# Altium PCB stm32f030.PcbDoc
Units mm, origin at the board's own origin, x right, y up, seen from the top; angles counter-clockwise.
Board outline 50 x 50 mm, 2 copper layers (Top Layer, Bottom Layer); 64 components, 41 nets, 240 pads, 200 vias.
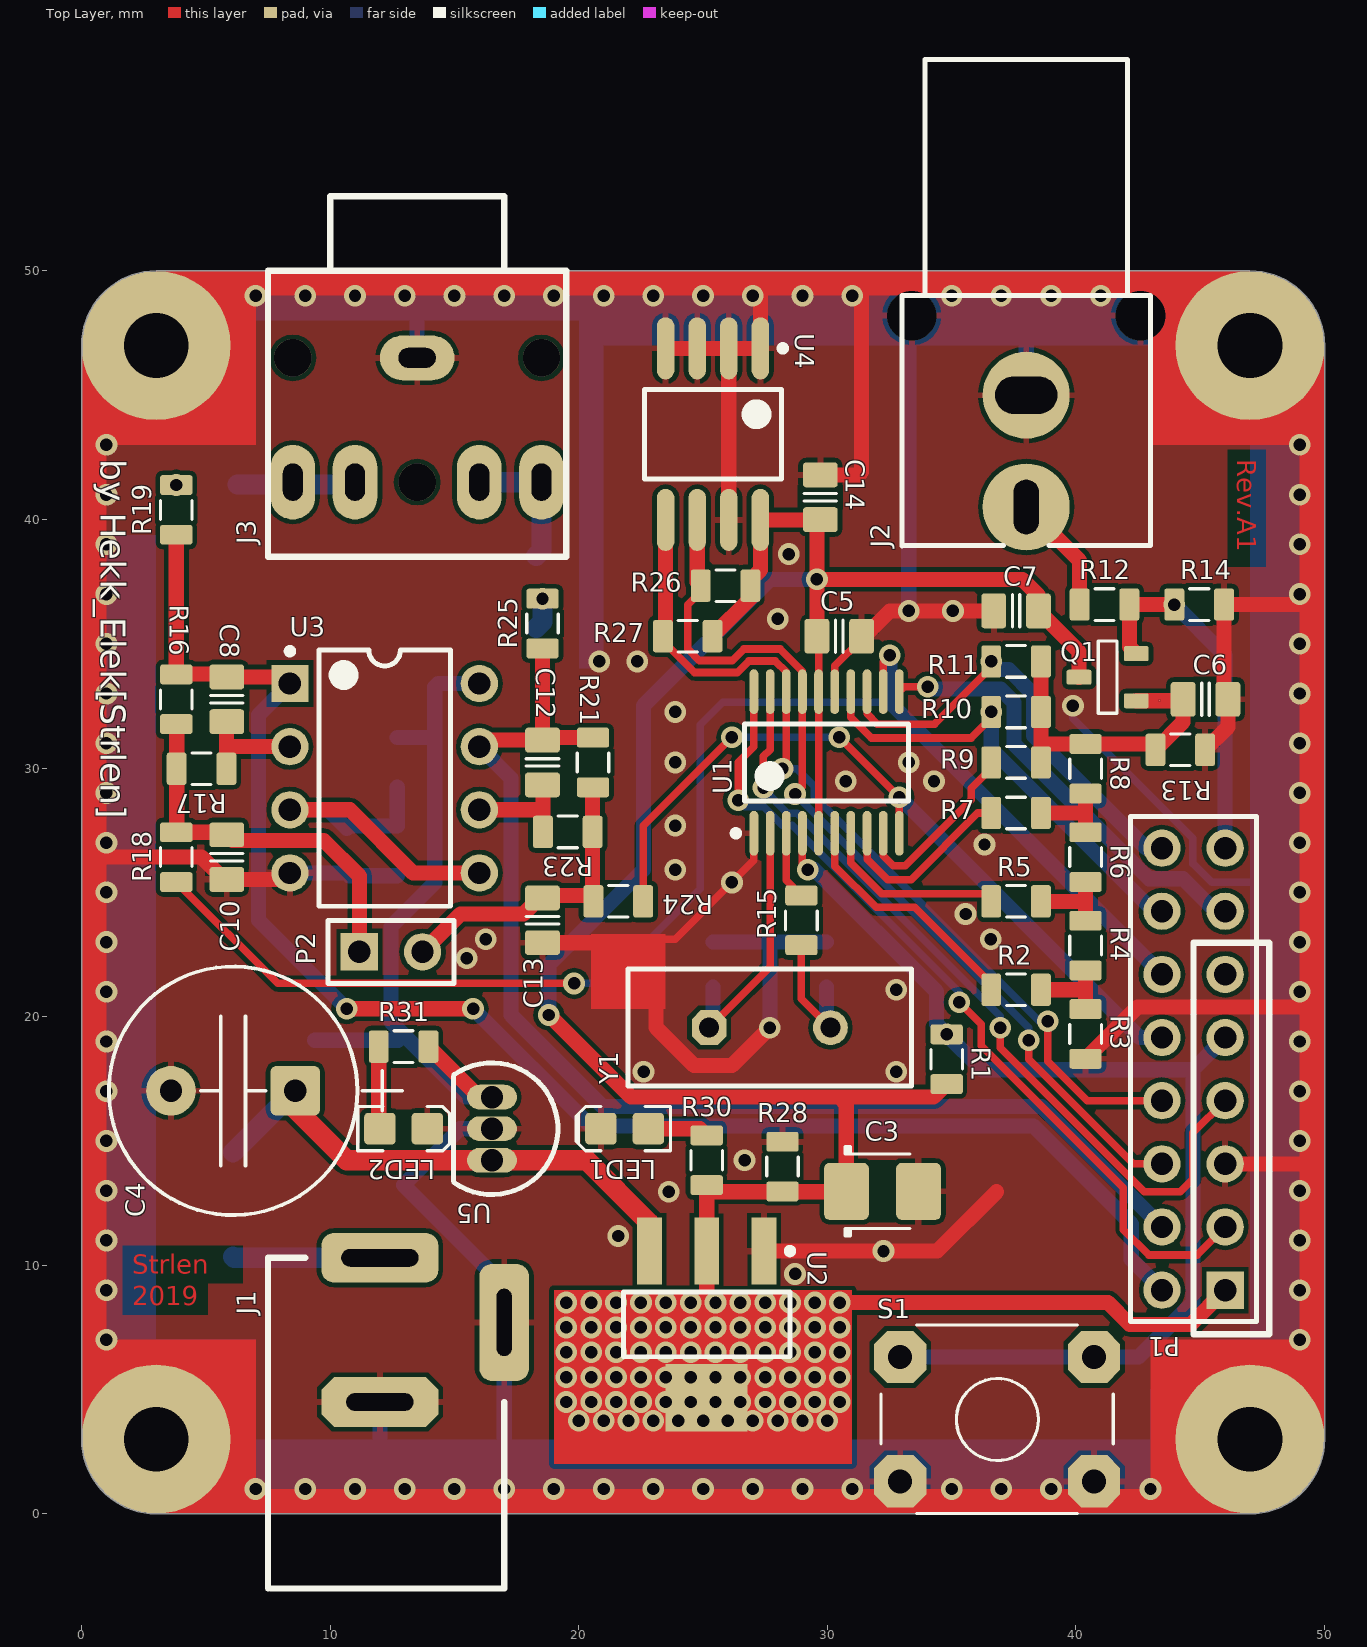
[diagram p0: Top Layer view]
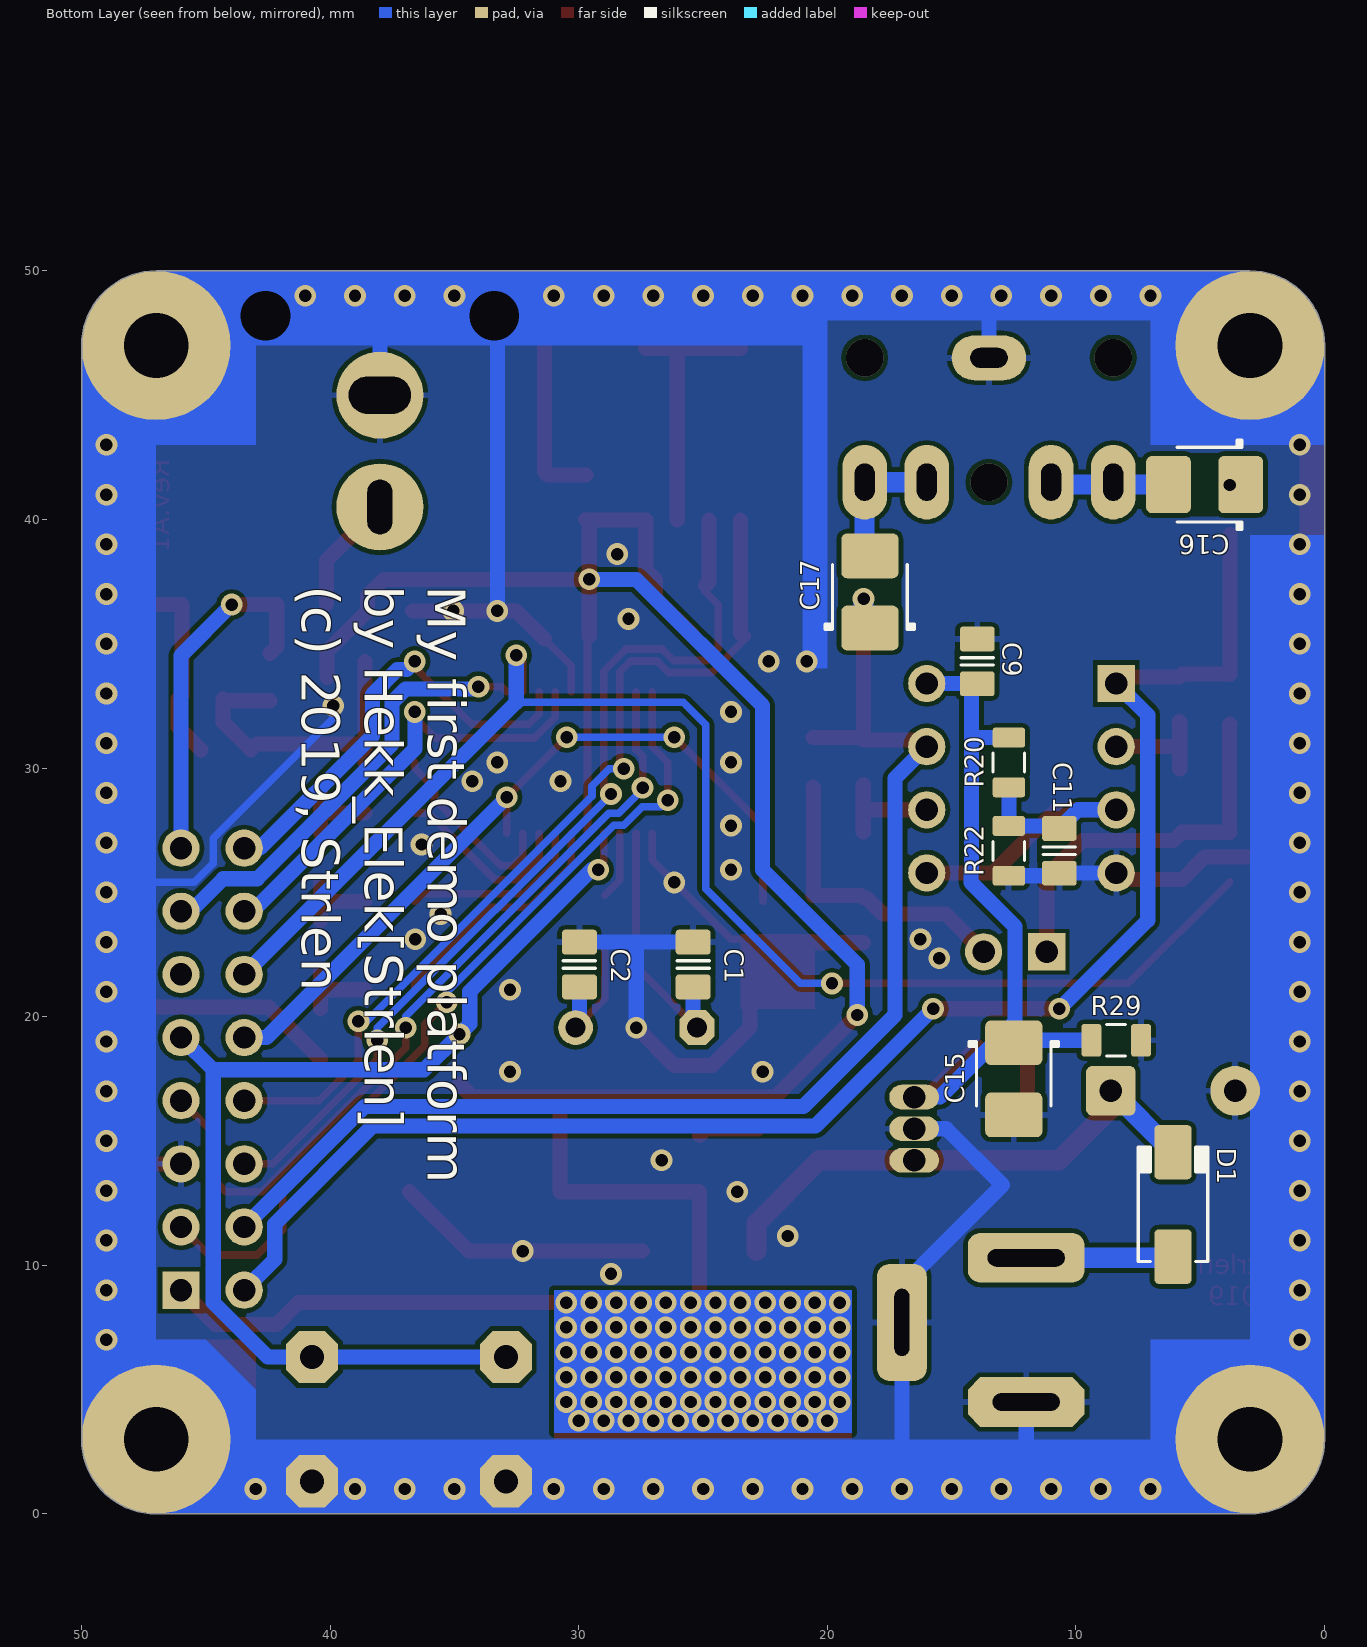
[diagram p1: Bottom Layer view, seen from below]
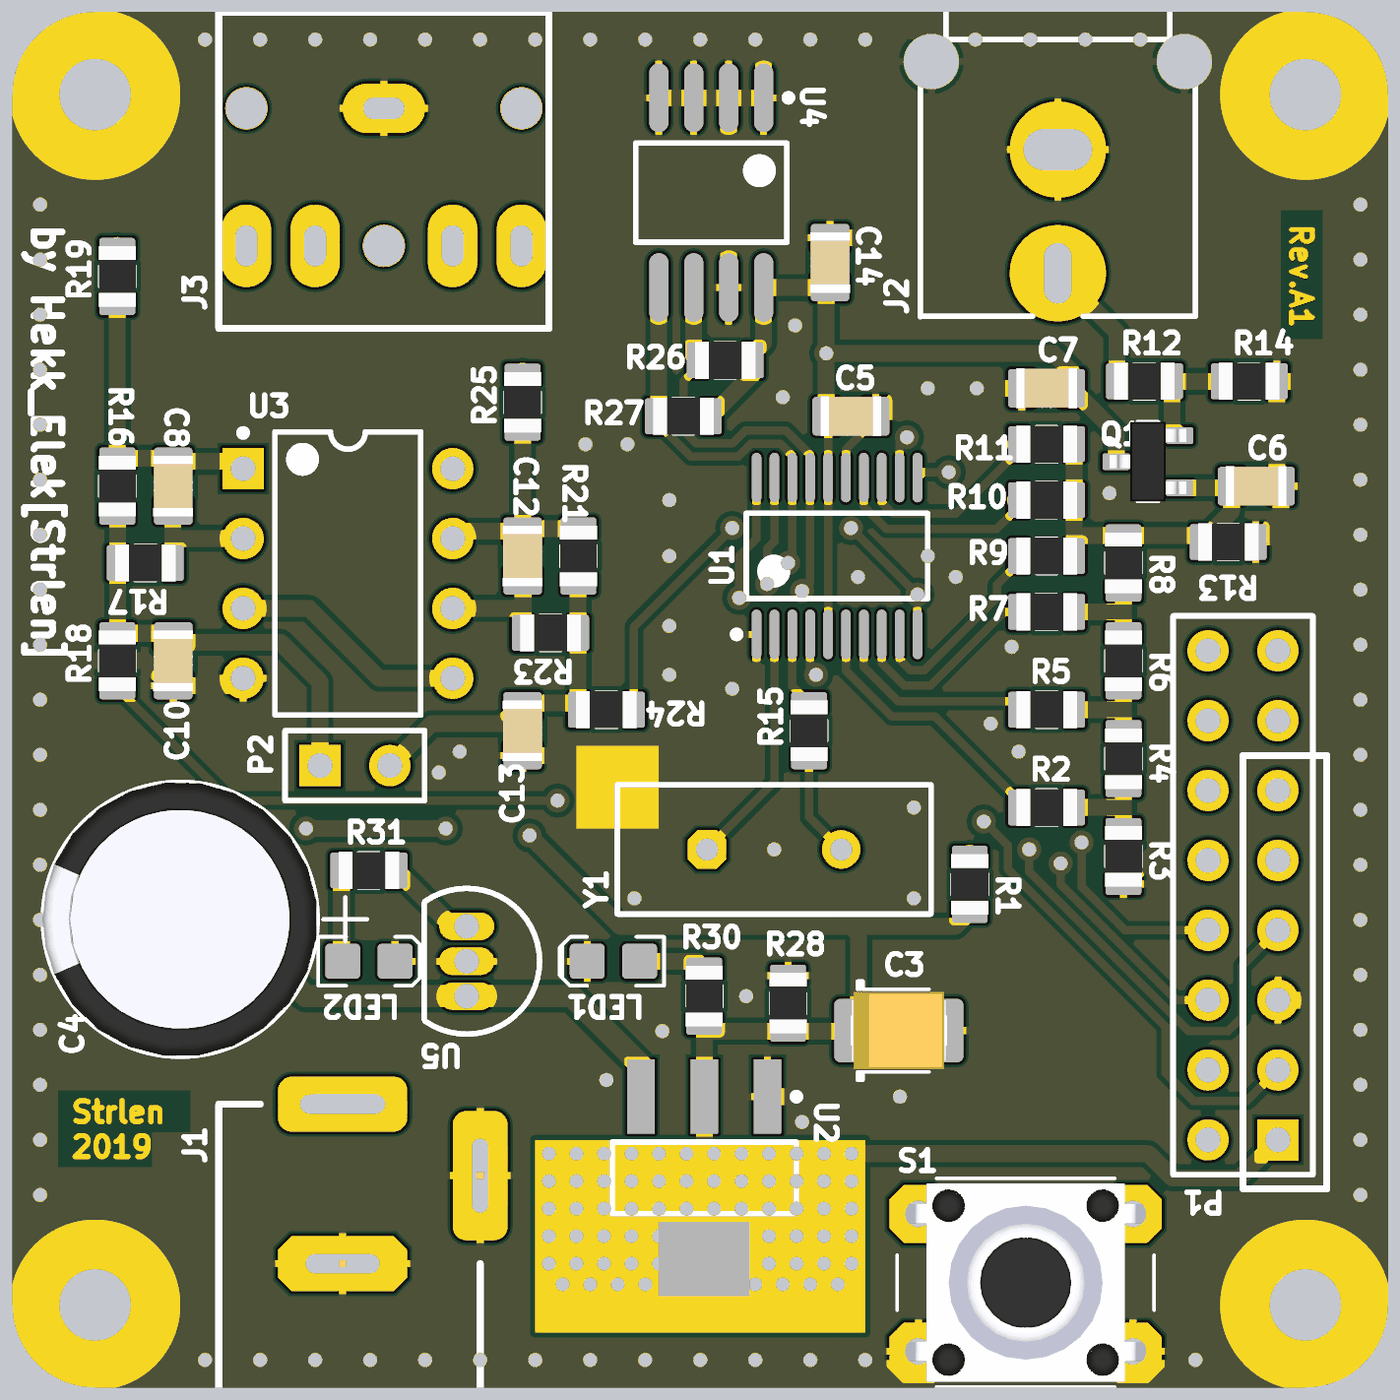
[diagram p2: 3D render of the assembled board from above, using the file's embedded part models]
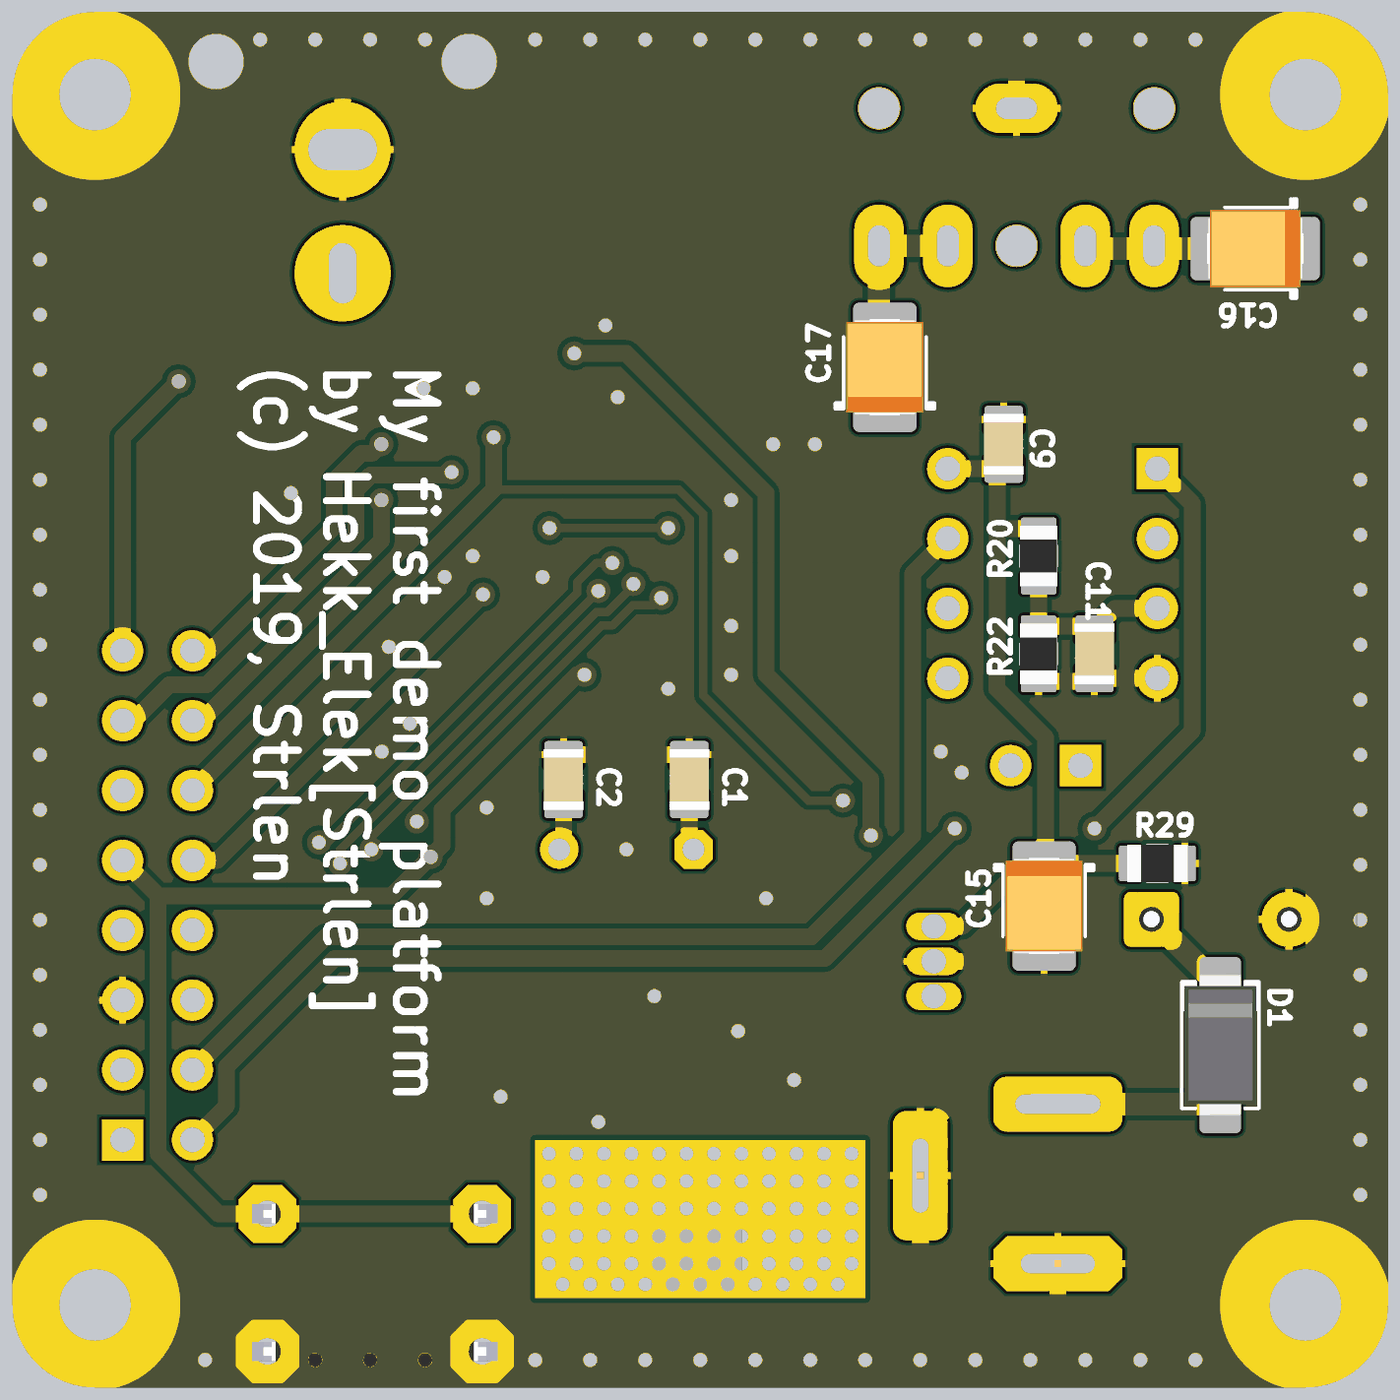
[diagram p3: 3D render of the assembled board from below, using the file's embedded part models]

## Layer stack, top to bottom
Top Layer: signal copper 0.0356
Dielectric: dielectric 0.32, FR-4, Dk 4.8
Bottom Layer: signal copper 0.0356

## Board outline
0,3 0,47 cw(c3,47) 3,50 47,50 cw(c47,47) 50,47 50,3 cw(c47,3) 47,0 3,0 cw(c3,3)

## Design rules (kind name [scope] priority, off if disabled: settings)
Clearance [All] p1: gap=0.178
PolygonConnect PolygonConnect_Vias [IsVia] p1: connectstyle=Direct reliefconductorwidth=0.254 reliefentries=4 polygonreliefangle="90 Angle"
PolygonConnect [All] p2: connectstyle=Relief reliefconductorwidth=0.254 reliefentries=4 polygonreliefangle="90 Angle"
RoutingVias [All] p1: holewidth=0.711 width=1.27 viastyle="Through Hole" minholewidth=0.711 minwidth=1.27 maxholewidth=0.711 maxwidth=1.27
SilkscreenOverComponentPads [All] p1: minsilkscreentomaskgap=0.254
SolderMaskExpansion [All] p1: expansion=0.102
Width [All] p1: maxlimit=1 minlimit=0.305 preferedwidth=0.61
27 further rules are at their usual default settings.

## Components (designator, comment, footprint, x,y, rotation, side; value= is the part's Value field where it differs from the comment)
C1 "Cap" CAPC2012X135N 25.4,22.098 r270 bottom
C2 "Cap" CAPC2012X135N 29.972,22.098 r270 bottom
C3 "Cap Pol2" CAPMP3528X210N 32.218,12.974 r0 top
C4 "47uF" CAPE5.0mm 6.096,17.018 r180 top
C5 "Cap" CAPC2012X135N 30.48,35.306 r180 top
C6 "Cap" CAPC2012X135N 45.212,32.766 r180 top
C7 "Cap" CAPC2012X135N 37.592,36.322 r0 top
C8 "NP0" CAPC2012X135N 5.842,32.766 r270 top
C9 "Cap" CAPC2012X135N 13.97,34.29 r270 bottom
C10 "NP0" CAPC2012X135N 5.842,26.416 r90 top
C11 "Cap" CAPC2012X135N 10.668,26.67 r90 bottom
C12 "NP0" CAPC2012X135N 18.542,30.226 r270 top
C13 "NP0" CAPC2012X135N 18.542,23.876 r90 top
C14 "Cap" CAPC2012X135N 29.718,40.894 r270 top
C15 "Cap Pol2" CAPMP3528X210N 12.5,17.5 r270 bottom
C16 "Cap Pol2" CAPMP3528X210N 4.826,41.402 r0 bottom
C17 "Cap Pol2" CAPMP3528X210N 18.288,37.084 r90 bottom
D1 "100V; 1.5A" DO-214AC 6.096,12.446 r90 bottom
J1 "DC-JACK" JACK 17,-3 r180 top locked
J2 "RCA" RCA/4.5-H2 38,49 r90 top locked
J3 "Line out" "STEREO JACK 3.5 mm" 10,53 r0 top locked
LED1 "" LED-0805-K 21.844,15.494 r180 top
LED2 "" LED-0805-K 12.954,15.494 r0 top
P1 "Debug/expansion" HDR2X8 46,9 r90 top locked
P2 "MONO" HDR1X2 11.176,22.606 r0 top
Q1 "NPN_MMBT3904" SOT23-3 41.275,33.655 r180 top
R1 "Res2" RESC2012X70N 34.798,18.288 r90 top
R2 "Res2" RESC2012X70N 37.592,21.082 r0 top
R3 "Res2" RESC2012X70N 40.386,19.304 r270 top
R4 "Res2" RESC2012X70N 40.386,22.86 r90 top
R5 "Res2" RESC2012X70N 37.592,24.638 r0 top
R6 "Res2" RESC2012X70N 40.386,26.416 r90 top
R7 "Res2" RESC2012X70N 37.592,28.194 r0 top
R8 "Res2" RESC2012X70N 40.386,29.972 r90 top
R9 "Res2" RESC2012X70N 37.592,30.226 r0 top
R10 "Res2" RESC2012X70N 37.592,32.258 r0 top
R11 "Res2" RESC2012X70N 37.592,34.29 r0 top
R12 "Res2" RESC2012X70N 41.148,36.576 r180 top
R13 "Res2" RESC2012X70N 44.196,30.734 r0 top
R14 "Res2" RESC2012X70N 44.958,36.576 r0 top
R15 "Res2" RESC2012X70N 28.956,23.876 r270 top
R16 "Res2" RESC2012X70N 3.81,32.766 r90 top
R17 "Res2" RESC2012X70N 4.826,29.972 r0 top
R18 "Res2" RESC2012X70N 3.81,26.416 r90 top
R19 "Res2" RESC2012X70N 3.81,40.386 r270 top
R20 "Res2" RESC2012X70N 12.7,30.226 r270 bottom
R21 "Res2" RESC2012X70N 20.574,30.226 r90 top
R22 "Res2" RESC2012X70N 12.7,26.67 r270 bottom
R23 "Res2" RESC2012X70N 19.558,27.432 r180 top
R24 "Res2" RESC2012X70N 21.59,24.638 r180 top
R25 "Res2" RESC2012X70N 18.542,35.814 r90 top
R26 "Res2" RESC2012X70N 25.908,37.338 r0 top
R27 "Res2" RESC2012X70N 24.384,35.306 r0 top
R28 "Res2" RESC2012X70N 28.194,13.97 r270 top
R29 "Res2" RESC2012X70N 8.382,19.05 r0 bottom
R30 "Res2" RESC2012X70N 25.146,14.224 r270 top
R31 "Res2" RESC2012X70N 12.954,18.796 r0 top
S1 "RESET" TACT-SWITCH-TC-37XB 36.83,3.81 r180 top
U1 "STM32F030F4P6" STM-TSSOP20_N 29.972,30.226 r90 top
U2 "LD1117S33CTR" SOT-223_M 25.146,7.62 r270 top
U3 "MCP6002" N08E 12.192,29.591 r0 top locked
U4 "24LC1025-I/SM" SOIJ-SM8_M 25.4,43.434 r270 top
U5 "MC78L05ABP" 29-04 16.51,15.494 r180 top
Y1 "13.875 MHz" HC-49U 27.686,19.558 r0 top

## Footprints (in the part's own frame and the unit in brackets; to place one, negate y for a bottom-side part, rotate by r counter-clockwise, add the part's x,y. Pads: shape width x height; smd on the part's side, far side on the other; paste and mask are expansions set on the pad)
29-04 [mm] "TO, Flat Index; 3 In-Line, Axial Leads; Body Dia. 4.8mm; Leads 0.48 x 0.51 mm (max)"
  oval 2x1 hole 0.9: 1(0,-1.27) 2(0,0) 3(0,1.27)
  silkscreen extent -2.65,-2.65 1.55,2.65
CAPC2012X135N [mm]
  round 0.254 on Mech15: 0(0,0)
  rrect25% 1x1.4 smd: 1(-0.9,0) 2(0.9,0)
  Top Layer pour cut-out: -0.675,0.7 -0.475,0.9 0.475,0.9 0.675,0.7 0.675,-0.7 0.475,-0.9 -0.475,-0.9 -0.675,-0.7
  silkscreen extent -0.15,-0.65 0.15,0.65, body extent -1.1,-0.72 1.1,0.73, height 1.34
CAPE5.0mm [mm]
  rrect25% 2x2 hole 0.9: 1(-2.5,0)
  round 2 hole 0.9: 2(2.5,0)
  silkscreen extent -6.8,-5 5,5, body extent -4.96,-4.97 4.95,4.96, height 20
CAPMP3528X210N [mm]
  round 0.254 on Mech15: 0(0,0)
  rrect25% 1.8x2.3 smd: 1(-1.45,0) 2(1.45,0)
  Top Layer pour cut-out: -0.508,1.27 0.508,1.27 0.508,-1.27 -0.508,-1.27
  silkscreen extent -1.5,-1.8 1.1,1.8, body extent -1.75,-1.4 1.75,1.4, height 2.1
DO-214AC [mm]
  round 0.508 on Mech15: 0(0,0)
  rrect25% 2.2x1.5 smd: A(-2.1,0) K(2.1,0)
  silkscreen extent -2.3,-1.4 2.3,1.4, body extent -2.6,-1.3 2.6,1.3, height 2.42
HC-49U [mm] "Quartz Crystal, Thru-Hole; 2 Leads; Body 11.35 x 4.65 x 13.46 mm (LxWxH max)"
  oct 1.4x1.4 hole 0.8: 1(-2.44,0)
  round 1.4 hole 0.8: 2(2.44,0)
  silkscreen extent -5.7,-2.35 5.7,2.35
HDR1X2 [mm] "Connector; Header; 2 Position"
  rect 1.5x1.5 hole 0.9: 1(0,0)
  round 1.5 hole 0.9: 2(2.54,0)
  silkscreen extent -1.27,-1.27 3.81,1.27
HDR2X8 [mm] "Connector; Header; 8x2 Position"
  rect 1.5x1.5 hole 0.9: 1(0,0)
  round 1.5 hole 0.9: 2(0,2.54) 3(2.54,0) 4(2.54,2.54) 5(5.08,0) 6(5.08,2.54) 7(7.62,0) 8(7.62,2.54) 9(10.16,0) 10(10.16,2.54) 11(12.7,0) 12(12.7,2.54) 13(15.24,0) 14(15.24,2.54) 15(17.78,0) 16(17.78,2.54)
  silkscreen extent -1.27,-1.27 19.05,3.81
JACK [mm]
  oct 4.7x2 hole 0.7 slot 2.7 at 0 deg: 1(5,-7.5)
  rrect50% 2x4.7 hole 0.6 slot 2.7 at 90 deg: 2(0,-10.7)
  rrect50% 4.7x2 hole 0.7 slot 3.1 at 0 deg: 3(5,-13.3)
  silkscreen extent 0,-13.3 9.5,0
LED-0805-K [mil]
  round 20 on Mech15: 0(0,0)
  rrect25% 50x50 smd: A(-37.5,0) K(37.5,0)
  Top Layer pour cut-out: -15,30 15,30 15,-30 -15,-30
  silkscreen extent -72,-35 77,35, body extent -39,-25 39,25, height 31
N08E [mm] "DIP, 8-Pin, Row Spacing 7.62 mm, Pitch 2.54 mm"
  rect 1.5x1.5 hole 0.9: 1(-3.81,3.81)
  round 1.5 hole 0.9: 2(-3.81,1.27) 3(-3.81,-1.27) 4(-3.81,-3.81) 5(3.81,-3.81) 6(3.81,-1.27) 7(3.81,1.27) 8(3.81,3.81)
  silkscreen extent -3.93,-5.15 2.65,5.23, body extent -3.6,-5.15 3.6,5.15, height 5.34
RCA/4.5-H2 [mm] "Two Conductor Jack (RCA), Right Angle, Thru-Hole, Body 10 x 10 x 13 mm (WxTxH)"
  round 3.5 hole 1.5 slot 2.5 at 90 deg: 1A(-4,0)
  round 3.5 hole 1 slot 2.2 at 0 deg: 2B(-8.496,0)
  silkscreen extent -10.07,-5 9.5,5
RESC2012X70N [mm]
  round 0.254 on Mech15: 0(0,0)
  rrect25% 0.8x1.3 smd: 1(-1,0) 2(1,0)
  Top Layer pour cut-out: -0.725,0.65 -0.525,0.85 0.525,0.85 0.725,0.65 0.725,-0.65 0.525,-0.85 -0.525,-0.85 -0.725,-0.65
  silkscreen extent -0.38,-0.64 0.38,0.64, body extent -1.1,-0.67 1.1,0.68, height 0.69
SOIJ-SM8_M [mm] "SOP, 8-Leads, Body 5.2x5.2mm, Pitch 1.27mm, IPC Low Density"
  oval 2.5x0.7 smd: 1(-3.45,1.905) 2(-3.45,0.635) 3(-3.45,-0.635) 4(-3.45,-1.905) 5(3.45,-1.905) 6(3.45,-0.635) 7(3.45,0.635) 8(3.45,1.905)
  silkscreen extent -3.57,-2.75 1.8,2.93, body extent -2.73,-2.75 2.73,2.75, height 2.04
SOT23-3 [mm] "SOT23, 3 pin"
  round 0.5 on Mech15: 0(0,0)
  rrect25% 1x0.6 smd: 1(-1.15,0.95) 2(-1.15,-0.95) 3(1.15,0)
  silkscreen extent -0.38,-1.45 0.38,1.45, body extent -1.4,-1.45 1.4,1.45, height 1.29
SOT-223_M [mm]
  rect 2.7x1 smd: 1(-2.95,2.3) 2(-2.95,0) 3(-2.95,-2.3)
  rect 2.7x3.3 smd: 4(2.95,0)
  silkscreen extent -3.07,-3.35 1.3,3.48, body extent -1.85,-3.35 1.85,3.35, height 1.8
"STEREO JACK 3.5 mm" [mm]
  oval 3x1.8 hole 0.8 slot 1.5 at 0 deg: 1(3.5,-6.5)
  oval 1.8x3 hole 0.8 slot 1.5 at 90 deg: 2(-1.5,-11.5) 3(8.5,-11.5) 4(1,-11.5) 5(6,-11.5)
  silkscreen extent -2.5,-14.5 9.5,0
STM-TSSOP20_N [mm] "SOP, 20-Leads, Body 6.6x4.5mm, Pitch 0.65mm, IPC Medium Density"
  oval 1.8x0.35 smd: 1(-2.85,2.925) 2(-2.85,2.275) 3(-2.85,1.625) 4(-2.85,0.975) 5(-2.85,0.325) 6(-2.85,-0.325) 7(-2.85,-0.975) 8(-2.85,-1.625) 9(-2.85,-2.275) 10(-2.85,-2.925) 11(2.85,-2.925) 12(2.85,-2.275) 13(2.85,-1.625) 14(2.85,-0.975) 15(2.85,-0.325) 16(2.85,0.325) 17(2.85,0.975) 18(2.85,1.625) 19(2.85,2.275) 20(2.85,2.925)
  silkscreen extent -2.97,-3.3 1.55,3.77, body extent -2.25,-3.3 2.25,3.3, height 1.2
TACT-SWITCH-TC-37XB [mm] "Wealth Metal sealed TH tact switch"
  round 0.508 on Mech15: 0(0,0)
  oct 2.1x2.1 hole 0.965: 1(-3.9,-2.5) 1(3.9,-2.5) 2(-3.9,2.5) 2(3.9,2.5)
  silkscreen extent -4.67,-3.79 4.67,3.79, body extent -4.46,-3.6 4.46,3.6, height 5

## Part data
C1 C2 C5 C6 C7 C9 C11 C14: "Capacitor"
C3 C15 C16 C17: library part "Cap Pol2_1", "Polarized Capacitor (Axial)"
C4: library part CAPE_33u_200V_THT, "Capacitor THT Alum Elec 33uF 20% 200V"
C8 C10 C12 C13: library part Cap, "Capacitor"
D1: library part DIODE_100V_1.5A_SMA, "Diode SMD 100V 1.5A SMA"
J1: "Tápcsatlakozó"
J2: "RCA Phono Jack, Right Angle, Thru-Hole, Snap-In"
J3: library part "STEREO JACK", "Sztereo audio csatlakozó 3,5 mm"
LED1 LED2: library part LED_SMD_Green_0805_12mcd, "LED 0805 SMD Green 12mcd 569nm"
P1: library part "Header 8X2", "Header, 8-Pin, Dual row"
P2: library part "Header 2", "Header, 2-Pin"
Q1: "Transistor SMD NPN 40V 0.2A 250mW SOT-23"
R1 R2 R3 R4 R5 R6 R7 R8 R9 R10 R11 R12 R13 R14 R15 R16 R17 R18 R19 R20 R21 R22 R23 R24 R25 R26 R27 R28 R29 R30 R31: "Resistor"
S1: library part SW_THT_PB_5.0mm, "Switch, tact, 5.0mm stem"
U1: "ARM Cortex-M0 32-bit MCU, 16 KB Flash, 4 KB Internal RAM, 15 I/Os, 20-pin TSSOP, -40 to 85 degC, Tube"
U2: "Fixed Low Drop Positive Voltage Regulator, 3.3V, 4-Pin SOT-223, Tape and Reel"
U3: library part TL082CP, "Wide Bandwidth Dual JFET Input Operational Amplifier, 8-pin MDIP"
U4: "1 Mbit, 400kHz, 2.5V, I2C Serial EEPROM, 8-Pin SOIC 208mil, Industrial Temperature"
U5: "Three-Terminal Low Current Positive Voltage Regulator"
Y1: library part ECS-10-13-1, "Crystal Oscillator"

## Free pads (board coordinates)
  round 6 hole 2.6: 0(3,3) 0(3,47) 0(47,3) 0(47,47)
  round 0 hole 2: 0(33.4,48.2) 0(42.6,48.2)

## Via types
v1: diameter 0.873, hole 0.5, Top Layer to Bottom Layer, tented both sides, 197 vias
v2: diameter 1.5, hole 1.5, Top Layer to Bottom Layer, 3 vias

## Nets (pads, with @x,y where several pads share a name; then routed paths per layer and width w, separated by ;. In a path a pad name is that pad's centre, name@x,y a point inside that pad or via, vN(x,y) a via of type N, cw(c..) or ccw(c..) an arc to the next point about the centre after c; other vN are vias at no path point)
AUDIO_L: C8.1 P1.2 R16.2 R19.2 U3.1 | length 63.8
  Top Layer w0.61: R19.2 R16.2 3.826,33.782 5.726,33.782 C8.1 8.117,33.666 U3.1 ; v1(10.668,20.32) v1(15.748,20.32)
  Bottom Layer w0.61: U3.1 7.112,32.131 7.112,23.876 v1(10.668,20.32) ; v1(15.748,20.32) 20.472,15.596 38.291,15.596 42.227,11.659 42.227,10.233 P1.2
AUDIO_R: C12.1 P1.4 R21.2 R25.1 U3.7 | length 49.5
  Top Layer w0.61: U3.7 16.267,31.126 C12.1 ; R25.1 C12.1 ; R21.2 18.642,31.226 C12.1
  Bottom Layer w0.61: U3.7 17.272,29.591 17.272,20.066 20.955,16.383 38.617,16.383 P1.4
AVDD: C9.2 C15.1 R20.1 R29.2 R31.2 U3.8 U5.1 | length 30
  Top Layer w0.61: R31.2 15.986,16.764 U5.1
  Bottom Layer w0.61: R29.2 12.723,19.05 C15.1@12.954,19.281 ; R20.1 14.208,31.226 ; U3.8 14.351,33.401 14.208,33.258 14.208,31.226 ; U5.1 15.471,16.764 C15.1@12.954,19.281 ; C15.1@12.954,19.281 12.446,19.789 12.446,23.622 14.224,25.4 14.224,25.908 14.208,25.924 14.208,31.226
COLOR0: R2.1 U1.6 | length 9.8
  Top Layer w0.305: U1.6 30.297,26.058 31.962,24.393 33.519,24.393 36.592,21.32 R2.1
COLOR1: R5.1 U1.7 | length 7.5
  Top Layer w0.305: U1.7 30.947,26.198 32.193,24.952 36.278,24.952 R5.1
COLOR2: R7.1 U1.8 | length 7.5
  Top Layer w0.305: U1.8 31.597,26.339 32.425,25.511 33.369,25.511 36.052,28.194 R7.1
COLOR3: R9.1 U1.9 | length 7.5
  Top Layer w0.305: U1.9 32.247,26.479 32.656,26.07 33.138,26.07 35.786,28.717 35.786,29.182 36.592,29.988 R9.1
CSYNC: P1.14 R10.1 U1.14 | length 18.7
  Top Layer w0.305: U1.14 30.947,32.039 31.775,31.211 35.783,31.211 36.592,32.02 v1(36.592,32.258)
  Bottom Layer w0.61: v1(36.592,32.258) 36.592,30.777 43.129,24.24 P1.14
GND: C1.1 C2.1 C3.2 C4.2 C5.1 C6.1 C7.1 C9.1 C10.1 C11.1 C13.1 C14.1 C15.2 J1.1 J1.2 J2.1A J3.1 LED1.K LED2.K P1.5 pad.0 R3.2 R13.2 R14.2 R22.2 R28.1 R29.1 S1.2 U1.1 U1.15 U2.1 U3.4 U4.1 U4.2 U4.3 U4.4 U4.7 U5.2 | length 147.5
  Top Layer w0.305: 23.368,23.114 23.876,23.114 v1(26.162,25.4) 27.047,26.285 U1.1 ; U1.15 30.297,34.107 31.38,35.19 C5.1
  Top Layer w0.61: 0.508,26.416 4.826,26.416 5.726,25.516 C10.1 8.117,25.516 U3.4 ; C13.1 20.966,22.976 21.082,22.86 ; 23.114,20.574 23.114,19.558 24.638,18.034 26.162,18.034 v1(27.686,19.558) ; U4.4 U4.3 U4.2 ; U4.7 U4.2 ; 27.432,49.53 27.305,49.403 U4.1 U4.2 ; U2.1 34.423,10.57 36.807,12.954 ; C14.1 31.264,41.794 31.38,41.91 31.38,49.138 v1@31.242,49.276 ; C5.1@31.38,35.19 32.512,36.322 v1(33.274,36.322) v1(35.052,36.322) C7.1 ; R3.2 42.475,20.393 49.203,20.393 49.276,20.32 ; R13.2 46.112,31.65 C6.1 45.958,32.92 R14.2 49.276,36.576 ; P1.5 49.42,14.08 49.53,13.97
  Bottom Layer w0.305: v1(39.878,32.512) 39.878,32.004 44.704,27.178 44.704,26.162 45.466,25.4 47.244,25.4
  Bottom Layer w0.61: U3.4 10.657,25.781 C11.1 10.768,25.67 R22.2 ; 11.938,2.54 12,2.602 J1.1 ; 13.462,48.514 13.5,48.476 J3.1 ; U5.2 15.217,15.494 12.954,13.231 17,9.185 J1.2 17,2.558 17.018,2.54 ; 20.436,36.968 20.574,36.83 ; C1.1 27.686,22.998 ; v1(27.686,19.558) 27.686,22.998 ; C2.1 27.686,22.998 ; v1(33.274,36.322) 33.274,47.244 33.528,47.498 ; 37.846,48.26 38,48.106 J2.1A
  other v1: 7,1 9,1 11,1 13,1 15,1 17,1 19,1 21,1 23,1 25,1 27,1 29,1 31,1 35,1 37,1 39,1 43,1 1,7 49,7 1,9 49,9 28.702,9.652 32.258,10.57 1,11 49,11 21.59,11.176 23.622,12.954 1,13 49,13 26.67,14.224 1,15 49,15 1,17 49,17 22.606,17.78 32.766,17.78 1,19 49,19 1,21 49,21 32.766,21.082 15.494,22.352 1,23 49,23 16.256,23.114 36.576,23.114 35.56,24.13 1,25 49,25 23.876,25.908 36.322,26.924 1,27 49,27 23.876,27.686 1,29 49,29 30.734,29.464 34.29,29.464 23.876,30.226 33.274,30.226 1,31 49,31 23.876,32.258 1,33 49,33 20.828,34.29 22.352,34.29 1,35 49,35 28,36 1,37 49,37 28.448,38.608 1,39 49,39 1,41 49,41 1,43 49,43 7,49 9,49 11,49 13,49 15,49 17,49 19,49 21,49 23,49 25,49 27,49 29,49 31,49 35,49 37,49 39,49 41,49
I2C_SCL: P1.6 R26.1 U1.17 U4.6 | length 37.6
  Top Layer w0.305: R26.1 24.908,37.1 24.384,36.576 24.384,34.798 24.856,34.326 26.175,34.326 26.638,34.789 28.106,34.789 28.997,33.898 U1.17 28.997,29.251 v1(28.702,28.956) ; v1(38.1,19.05) 38.1,18.288 42.308,14.08 P1.6
  Top Layer w0.61: U4.6 24.765,37.481 R26.1
  Bottom Layer w0.305: v1(28.702,28.956) 38.1,19.558 v1(38.1,19.05)
I2C_SDA: P1.8 R27.1 U1.18 U4.5 | length 36.7
  Top Layer w0.305: R27.1 23.384,35.116 24.656,33.843 26.375,33.843 26.838,34.306 27.906,34.306 28.347,33.865 U1.18 28.347,30.125 v1(28.194,29.972) ; v1(38.862,19.812) 38.867,19.807 38.867,18.204 40.45,16.62 P1.8
  Top Layer w0.61: R27.1 23.495,35.417 U4.5
  Bottom Layer w0.305: v1(28.194,29.972) 28.77,29.972 29.469,29.274 29.469,28.872 38.528,19.812 v1(38.862,19.812)
NetC1_2: C1.2 U1.2 Y1.1 | length 10.5
  Top Layer w0.305: Y1.1 27.697,22.009 U1.2
  Bottom Layer w0.61: Y1.1 25.4,19.712 C1.2
NetC2_2: C2.2 R15.2 Y1.2 | length 5.5
  Top Layer w0.305: R15.2 28.956,20.728 Y1.2
  Bottom Layer w0.61: C2.2 29.972,19.712 Y1.2
NetC4_1: C4.1 D1.K U2.3 U5.3 | length 21.6
  Top Layer w0.813: C4.1 8.596,16.296 10.668,14.224 U5.3 20.32,14.224 22.846,11.698 U2.3
  Bottom Layer w0.61: D1.K D1.K@6.124,14.546 ; C4.1@8.568,17.018 C4.1
  Bottom Layer w0.813: D1.K C4.1@8.568,17.018
NetC6_2: C6.2 Q1.1 R8.2 R9.2 R10.2 R11.2 R13.1 | length 13.2
  Top Layer w0.61: R9.2 38.592,30.988 ; R11.2 R10.2 38.592,30.988 ; Q1.1 44.251,32.705 C6.2 44.312,31.85 R13.1 42.958,30.972 R8.2 38.608,30.972 38.592,30.988
NetC8_2: C8.2 R17.2 U3.2 | length 4.5
  Top Layer w0.61: R17.2 5.826,30.734 ; C8.2 5.826,31.85 5.826,30.734 ; U3.2 5.953,30.861 5.826,30.734
NetC10_2: C10.2 P2.1 R16.1 R17.1 R18.2 | length 15.5
  Top Layer w0.61: R16.1 3.826,31.75 R17.1 3.826,27.432 R18.2 5.742,27.416 C10.2 6.07,27.088 9.742,27.088 11.176,25.654 P2.1
NetC12_2: C12.2 R23.2 U3.6 | length 4.5
  Top Layer w0.61: U3.6 18.431,28.321 18.558,28.194 ; C12.2 18.558,29.31 18.558,28.194 ; R23.2 18.558,28.194
NetC13_2: C13.2 P2.2 R21.1 R23.1 R24.2 | length 12.1
  Top Layer w0.61: P2.2 15.24,24.13 17.78,24.13 18.426,24.776 C13.2 18.642,24.876 R24.2@20.574,24.876 ; R24.2@20.558,24.892 R23.1 20.558,29.21 R21.1
NetC16_1: C16.1 R19.1
  other v1: 3.81,41.386
NetC16_2: C16.2 J3.2 J3.4 | length 4.8
  Bottom Layer w0.813: C16.2 10.902,41.402 J3.4
NetC17_1: C17.1 R25.2 | length 1.3
  Bottom Layer w0.813: C17.1 18.542,35.888 v1(18.542,36.814)
NetC17_2: C17.2 J3.3 J3.5 | length 5.6
  Bottom Layer w0.813: J3.5 J3.3 18.5,38.746 C17.2
NetD1_A: D1.A J1.3 | length 5.9
  Bottom Layer w0.813: D1.A 6.142,10.3 J1.3
NetJ2_2B: J2.2B R12.2 | length 4.8
  Top Layer w0.61: J2.2B 40.148,38.356 R12.2
NetLED1_A: LED1.A R30.1 | length 2.5
  Top Layer w0.61: LED1.A 24.876,15.494 R30.1
NetLED2_A: LED2.A R31.1 | length 3.3
  Top Layer w0.61: R31.1 11.954,15.542 LED2.A
NetR2_2: R2.2 R3.1 R4.1 | length 3.3
  Top Layer w0.61: R2.2 40.386,21.082 ; R3.1 40.386,21.082 ; R4.1 40.386,21.082
NetR4_2: R4.2 R5.2 R6.1 | length 3.3
  Top Layer w0.61: R5.2 40.386,24.638 ; R4.2 40.386,24.638 ; R6.1 40.386,24.638
NetR6_2: R6.2 R7.2 R8.1 | length 3.3
  Top Layer w0.61: R7.2 40.386,28.194 ; R6.2 40.386,28.194 ; R8.1 40.386,28.194
NetR15_1: R15.1 U1.3 | length 2.8
  Top Layer w0.305: U1.3 28.347,25.485 R15.1
NRST: P1.9 R1.2 S1.1 U1.4 | length 45
  Top Layer w0.305: U1.4 28.997,26.121 v1(29.21,25.908)
  Bottom Layer w0.61: v1(29.21,25.908) 29.487,25.908 34.387,21.008 34.387,19.699 v1(34.798,19.288) 36.222,17.864 44.704,17.864 ; S1.1@32.93,6.31 40.73,6.31 42.513,6.31 44.704,8.501 44.704,17.864 ; P1.9 44.704,17.864
PWM_L: P1.12 R18.1 U1.12 | length 57.9
  Top Layer w0.305: R18.1 7.89,21.336 v1(19.812,21.336) ; U1.12 32.247,34.279 v1(32.512,34.544)
  Bottom Layer w0.305: v1(19.812,21.336) 21.082,21.336 24.892,25.146 24.892,31.75 25.79,32.648 32.512,32.648
  Bottom Layer w0.61: v1(32.512,34.544) 32.512,32.648 P1.12
PWM_R: P1.10 R24.1 U1.10 | length 31.8
  Top Layer w0.305: R24.1 22.59,27.67 v1(26.162,31.242) ; v1(30.48,31.242) v1(32.897,28.825) U1.10
  Bottom Layer w0.305: v1(26.162,31.242) v1(30.48,31.242)
  Bottom Layer w0.61: v1(32.897,28.825) 42.562,19.16 P1.10
SWCLK: P1.3 U1.20 | length 34
  Top Layer w0.305: v1(26.416,28.702) 26.416,30.226 27.047,30.857 U1.20 ; v1(35.306,20.574) 36.19,19.69 36.19,18.833 41.91,13.113 41.91,11.43 42.926,10.414 44.874,10.414 P1.3
  Bottom Layer w0.305: v1(26.416,28.702) 26.675,28.443 27.448,28.443 28.185,27.707 28.586,27.707 35.306,20.987 v1(35.306,20.574)
SWDIO: P1.7 U1.19 | length 32.8
  Top Layer w0.305: v1@27.178,29.21 27.432,29.464 27.432,29.65 27.427,29.654 27.427,30.475 27.697,30.745 U1.19 ; v1(36.957,19.558) 36.957,18.749 42.752,12.954 44.196,12.954 44.704,13.462 44.704,15.324 P1.7
  Bottom Layer w0.305: v1(27.432,29.21) 27.432,29.142 28.384,28.189 28.786,28.189 36.957,20.019 v1(36.957,19.558)
TELETEXT: P1.16 R11.1 U1.13 | length 18.2
  Top Layer w0.305: U1.13 31.597,32.179 32.006,31.77 34.31,31.77 36.592,34.052 v1(36.592,34.29)
  Bottom Layer w0.61: v1(36.592,34.29) 36.918,33.964 37.299,33.964 38.298,32.965 38.298,31.298 42.816,26.78 P1.16
TELETEXT_CLK: P1.13 U1.11 | length 17.9
  Top Layer w0.305: U1.11 33.095,33.274 v1(34.036,33.274)
  Bottom Layer w0.61: v1(34.036,33.274) 34.133,33.177 36.973,33.177 37.511,32.639 37.511,30.971 42.935,25.547 44.303,25.547 45.61,24.24 P1.13
VDD: C3.1 C5.2 C7.2 C14.2 P1.1 Q1.3 R1.1 R26.2 R27.2 R28.2 R30.2 U1.5 U1.16 U2.2 U2.4 U4.8 | length 108.7
  Top Layer w0.305: C5.2 29.647,35.239 U1.16 U1.5
  Top Layer w0.61: v1(18.796,20.066) 22.098,16.764 30.48,16.764 ; U2.4 U2.2 25.146,12.954 30.757,12.954 30.757,16.487 30.48,16.764 ; R27.2 26.908,36.83 R26.2 26.908,37.576 27.305,37.973 U4.8 C14.2@29.708,39.984 ; C5.2 v1(29.58,37.592) ; C14.2 C14.2@29.708,39.984 ; v1(30.5,8.5) 41.284,8.5 42.164,7.62 44.62,7.62 P1.1 ; R1.1 34.274,16.764 30.48,16.764 ; Q1.3 40.125,34.689 C7.2 38.492,36.946 37.846,37.592 v1(29.58,37.592) ; v1(29.58,37.592) 29.58,39.856 C14.2@29.708,39.984
  Bottom Layer w0.61: v1(18.796,20.066) 18.796,22.098 22.606,25.908 22.606,32.512 27.686,37.592 v1(29.58,37.592)
  other v1: 20,3.75 21,3.75 22,3.75 23,3.75 24,3.75 25,3.75 26,3.75 27,3.75 28,3.75 29,3.75 30,3.75 19.5,4.5 20.5,4.5 21.5,4.5 22.5,4.5 23.5,4.5 24.5,4.5 25.5,4.5 26.5,4.5 27.5,4.5 28.5,4.5 29.5,4.5 30.5,4.5 19.5,5.5 20.5,5.5 21.5,5.5 22.5,5.5 23.5,5.5 24.5,5.5 25.5,5.5 26.5,5.5 27.5,5.5 28.5,5.5 29.5,5.5 30.5,5.5 19.5,6.5 20.5,6.5 21.5,6.5 22.5,6.5 23.5,6.5 24.5,6.5 25.5,6.5 26.5,6.5 27.5,6.5 28.5,6.5 29.5,6.5 30.5,6.5 19.5,7.5 20.5,7.5 21.5,7.5 22.5,7.5 23.5,7.5 24.5,7.5 25.5,7.5 26.5,7.5 27.5,7.5 28.5,7.5 29.5,7.5 30.5,7.5 19.5,8.5 20.5,8.5 21.5,8.5 22.5,8.5 23.5,8.5 24.5,8.5 25.5,8.5 26.5,8.5 27.5,8.5 28.5,8.5 29.5,8.5
VGND: C11.2 R20.2 R22.1 U3.3 U3.5 | length 14.9
  Top Layer w0.61: U3.3 10.795,28.321 13.335,25.781 U3.5
  Bottom Layer w0.61: U3.3 9.917,28.321 C11.2 10.768,27.67 R22.1 R20.2
VIDEO: P1.15 Q1.2 R12.1 R14.1 | length 14.5
  Top Layer w0.61: Q1.2 42.148,34.882 R12.1 v1(43.958,36.576)
  Bottom Layer w0.61: v1(43.958,36.576) 46,34.534 P1.15
pads on no net: C1.0 C2.0 C3.0 C5.0 C6.0 C7.0 C8.0 C9.0 C10.0 C11.0 C12.0 C13.0 C14.0 C15.0 C16.0 C17.0 D1.0 LED1.0 LED2.0 P1.11 Q1.0 R1.0 R2.0 R3.0 R4.0 R5.0 R6.0 R7.0 R8.0 R9.0 R10.0 R11.0 R12.0 R13.0 R14.0 R15.0 R16.0 R17.0 R18.0 R19.0 R20.0 R21.0 R22.0 R23.0 R24.0 R25.0 R26.0 R27.0 R28.0 R29.0 R30.0 R31.0 S1.0
copper on no net:
  other v2: 13.5,41.5 8.5,46.5 18.5,46.5

## Polygon pours and split planes (outlines as drawn)
GND on Top Layer "Top Layer-No Net" (solid, remove dead copper, pour order 2): 0,0 50,0 50,50 0,50
GND on Bottom Layer "Top Layer-No Net" (solid, remove dead copper, pour order 4): 0,0 50,0 50,50 0,50

## Other copper
Top Layer:
  rectangle net VDD: 19,2 31,9
  region net GND: 3,1 3,0 47,0 47,1
  rectangle net GND: 49,3 50,47
  region net GND: 47,49 47,50 3,50 3,49
  rectangle net GND: 0,3 1,47
  rectangle net GND: 20.492,20.318 23.492,23.318
  region net GND: 7,0 7,7 0,7 0,4 4,0
  region net GND: 50,7 43,7 43,0 46,0 50,4
  region net GND: 43,50 43,43 50,43 50,46 46,50
  region net GND: 0,43 7,43 7,50 4,50 0,46
  text "Rev.A1" at 46.482,42.418 h0.76 r270
  text "Strlen" at 2.032,9.652 h0.76
  text "2019" at 2.032,8.382 h0.76
Bottom Layer:
  rectangle net GND: 0,43 3,47
  rectangle net VDD: 19,3.25 31,9
  rectangle net GND: 20,34 21,47
  rectangle net GND: 3,48 20,50
  region net GND: 47,47 47,50 20,50 20,47
  rectangle net GND: 47,3 50,47
  region net GND: 3,3 3,0 47,0 47,3
  rectangle net GND: 0,3 3,39.37
  region net GND: 7,0 7,7 0,7 0,4 4,0
  region net GND: 43,50 43,43 50,43 50,46 46,50
  region net GND: 0,43 7,43 7,50 4,50 0,46
  region net GND: 47,0 43,0 43,5 45,7 50,7 50,3

## Silkscreen, mask and mechanical layers (free items; w line width, h text height)
Top Overlay:
  lines w0.254: 44.73,7.222 44.73,22.97 47.778,22.97 47.778,7.222 44.73,7.222
  text "by Hekk_Elek[Strlen]" at 0.762,42.418 h1.02 r270
Bottom Overlay:
  text "My first demo platform" at 36.068,37.338 h1.52 r90
  text "by Hekk_Elek[Strlen]" at 38.608,37.338 h1.52 r90
  text "(c) 2019, Strlen" at 41.148,37.338 h1.52 r90
Top Solder:
  rectangle: 19,2 31,9
  rectangle: 20.492,20.318 23.492,23.318
  text "Rev.A1" at 46.482,42.418 h0.76 r270
  text "Strlen" at 2.032,9.652 h0.76
  text "2019" at 2.032,8.382 h0.76
Bottom Solder:
  rectangle: 19,3.25 31,9
Mechanical 5:
  the board outline again, w0.254

## Text inside footprints (layer, text, board x,y; h text height)
J2: Mechanical 1 "PCB Edge" at 42.618,48.667 h0.25 r180